# Altium PCB Probe.PcbDoc (part 2 of 2)
Units mil, origin at the board's own origin, x right, y up, seen from the top; angles counter-clockwise.
Board outline 2755.91 x 787.4 mil, 4 copper layers (Top, Ground, Layer 1, Bottom Layer), stack 51.58 mil thick; 53 components, 31 nets, 148 pads, 198 vias.
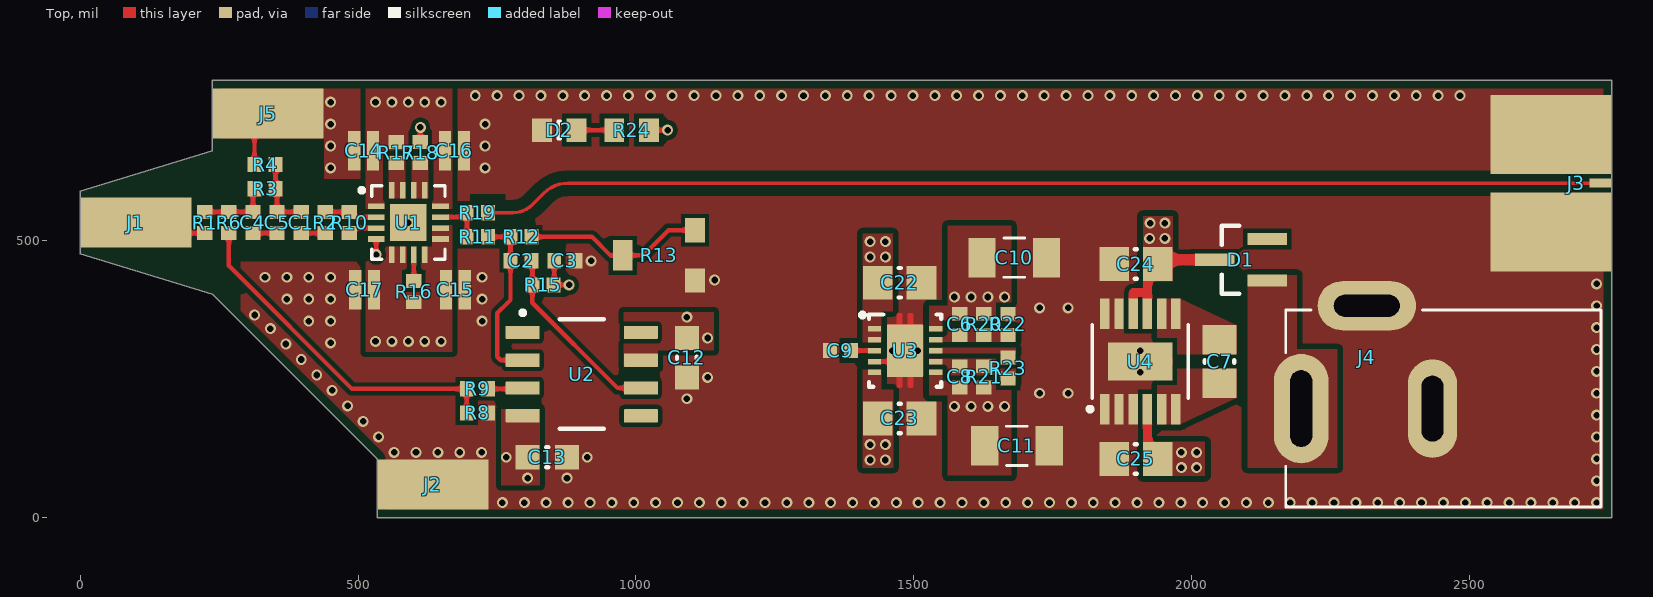
[diagram p0: Top view]

## Silkscreen, mask and mechanical layers (free items; w line width, h text height) (continued)
Top Overlay: (continued)
  circle w10: c796.26,369.09 r2.86
  circle w10: c506.57,589.49 r2.86
Board Layer Stack Bottom Overlay:
  text "SIGNAL INPUT / MAXIMUM +/- 30 V" at 1097.44,614.17 h40
  text "BUF802 ACTIVE PROBE / REV D-caleb '26 / JAMES WILSON 2024" at 2590.55,553.15 h40
  text "We" at 1759.84,523.62 h236.22
  text "DC POWER / 9-12 V" at 2086.61,192.91 h40
Top Solder:
  rectangle: 2680.84,585.63 2699.8,619.09
Mechanical 1:
  the board outline again, w3.94
  text "stackup: JLC06161H-3313" at 575,-227.32 h100
  text "50 ohms = 6.1600 per JLC calculator" at 572.98,-394.32 h100

## Text inside footprints (layer, text, board x,y; h text height)
U1: Mechanical 8 "*" at 480.05,545.87 h50